# EAGLE board battery-charger (EAGLE 9.6.2)

Size 160 x 100 mm. Coordinates in mm from the lower left corner, seen from the top.
Outline: 0,0 160,0 160,100 0,100 0,0
Copper layers (1*16): Top 0.035mm / dielectric 1.5mm / Bottom 0.035mm
Design rules "default": minimum track width 6mil, minimum drill 0.35mm, track to track 6mil, track to pad 6mil, pad to pad 6mil, via to via 6mil, smd to smd 6mil, copper to edge 40mil, drill to drill 6mil, minimum pad ring 10mil, minimum via ring 8mil, stop-mask expansion 4mil, vias tented up to drill 0mil, thermal gap 10mil

## Footprints (pad centres in the part's own frame; a part is rotated, then mirrored left to right if it is on the bottom)
C5B4.5 = drill 0.813 pad 1.6 octagon: 1 -2.54,0; 2 2.54,0
C0603 = smd 1.1 x 1: 1 -0.85,0; 2 0.85,0
DIP794W53P254L959H508Q8N = drill 0.73 pad 1.13 square: 1 -3.97,3.81 | drill 0.73 pad 1.13: 2 -3.97,1.27; 3 -3.97,-1.27; 4 -3.97,-3.81; 5 3.97,-3.81; 6 3.97,-1.27; 7 3.97,1.27; 8 3.97,3.81
SHDR2W50P0X200_1X2_590X450X600 = drill 0.7 pad 1.1 square: 1 0,0 | drill 0.7 pad 1.1: 2 -2,0
LED-0603 = smd 1 x 1: A -0.877,0; C 0.877,0
R0603 = smd 1 x 1.1: 1 -0.85,0; 2 0.85,0
SOT23-5 = smd 0.55 x 1.2: 1 -0.95,-1.3; 2 0,-1.3; 3 0.95,-1.3; 4 0.95,1.3; 5 -0.95,1.3

## Placement (x,y rotation side)
C1  4.7uF  [C5B4.5]  -26.67,5.08 0 top  (outside the outline)
C2  4.7uF  [C5B4.5]  -34.29,5.08 0 top  (outside the outline)
C3  0.1uF  [C0603]  -21.59,24.13 0 top  (outside the outline)
C4  0.1uF  [C0603]  -25.4,24.13 0 top  (outside the outline)
C5  0.1uF  [C0603]  -40.64,-22.86 0 top  (outside the outline)
IC1  TLV2462IP  [DIP794W53P254L959H508Q8N]  -17.78,6.35 0 top  (outside the outline)
J2  B2B-PH-K-S_LF__SN_  [SHDR2W50P0X200_1X2_590X450X600]  -29.21,13.97 0 top  (outside the outline)
LED1  [LED-0603]  -15.24,34.29 0 top  (outside the outline)
LED2  [LED-0603]  -19.05,34.29 0 top  (outside the outline)
R1  330  [R0603]  -33.02,24.13 0 top  (outside the outline)
R2  470  [R0603]  -36.83,24.13 0 top  (outside the outline)
R3  4.7k  [R0603]  -29.21,24.13 0 top  (outside the outline)
R4  10k  [R0603]  -15.24,30.48 0 top  (outside the outline)
R5  10k  [R0603]  -19.05,30.48 0 top  (outside the outline)
R6  47k  [R0603]  -40.64,-2.54 0 top  (outside the outline)
R7  10k  [R0603]  -40.64,-7.62 0 top  (outside the outline)
R8  47k  [R0603]  -40.64,-12.7 0 top  (outside the outline)
R9  10k  [R0603]  -40.64,-17.78 0 top  (outside the outline)
U1  MCP73831.SOT23-5  [SOT23-5]  -16.51,16.51 0 top  (outside the outline)

## Library data of the parts
C1 C2 = capacitor-wima
C3-C5 R1-R9 = LinnesLab-Passives
IC1 = SamacSys_Parts; ARROW_PART_NUMBER: TLV2462IP; ARROW_PRICE-STOCK: https://www.arrow.com/en/products/tlv2462ip/texas-instruments; DESCRIPTION: Dual Low-Power, Rail-to-Rail Input/Output Operational Amplifier; HEIGHT: 5.08mm; MANUFACTURER_NAME: Texas Instruments; MANUFACTURER_PART_NUMBER: TLV2462IP; MOUSER_PART_NUMBER: 595-TLV2462IP; MOUSER_PRICE-STOCK: https://www.mouser.co.uk/ProductDetail/Texas-Instruments/TLV2462IP?qs=0le1rQK8zxo1BiHyPl8Tnw%3D%3D
J2 = SamacSys_Parts; ARROW_PART_NUMBER: B2B-PH-K-S(LF)(SN); ARROW_PRICE-STOCK: https://www.arrow.com/en/products/b2b-ph-k-s-lf-sn/jst-manufacturing; DESCRIPTION: Conn Shrouded Header HDR 2 POS 2mm Solder ST Thru-Hole Box; HEIGHT: 6mm; MANUFACTURER_NAME: JST (JAPAN SOLDERLESS TERMINALS); MANUFACTURER_PART_NUMBER: B2B-PH-K-S(LF)(SN)
LED1 LED2 = LinnesLab-LED
U1 = LinnesLab-Power

## Nets
5V: C1.1 C4.1 C5.2 IC1.8 R4.2 R6.2 R7.2 U1.4
GND: C1.2 C2.2 C3.2 C4.2 C5.1 IC1.4 J2.2 LED1.C LED2.C R3.2 R5.1 R8.1 R9.1 U1.2
N$1: IC1.1 R1.2
N$2: LED1.A R1.1
N$3: IC1.7 R2.1
N$4: LED2.A R2.2
N$5: R3.1 U1.5
STAT: IC1.3 IC1.6 R4.1 R5.2 U1.1
V_BATT: C2.1 C3.1 J2.1 U1.3
V_HI: IC1.2 R7.1 R8.2
V_LO: IC1.5 R6.1 R9.2

## Tracks (layer width: path | path; a pad name or v marks a point on that pad's centre or on a via)
5V  (7 unrouted)
GND  (13 unrouted)
N$1  (1 unrouted)
N$2  (1 unrouted)
N$3  (1 unrouted)
N$4  (1 unrouted)
N$5  (1 unrouted)
STAT  (4 unrouted)
V_BATT  (3 unrouted)
V_HI  (2 unrouted)
V_LO  (2 unrouted)